# Altium PCB PCB1.PcbDoc
Units mil, origin at the board's own origin, x right, y up, seen from the top; angles counter-clockwise.
Board outline 1540 x 1430 mil, 2 copper layers (Top Layer, Bottom Layer); 5 components, 0 nets, 52 pads, 7 vias.
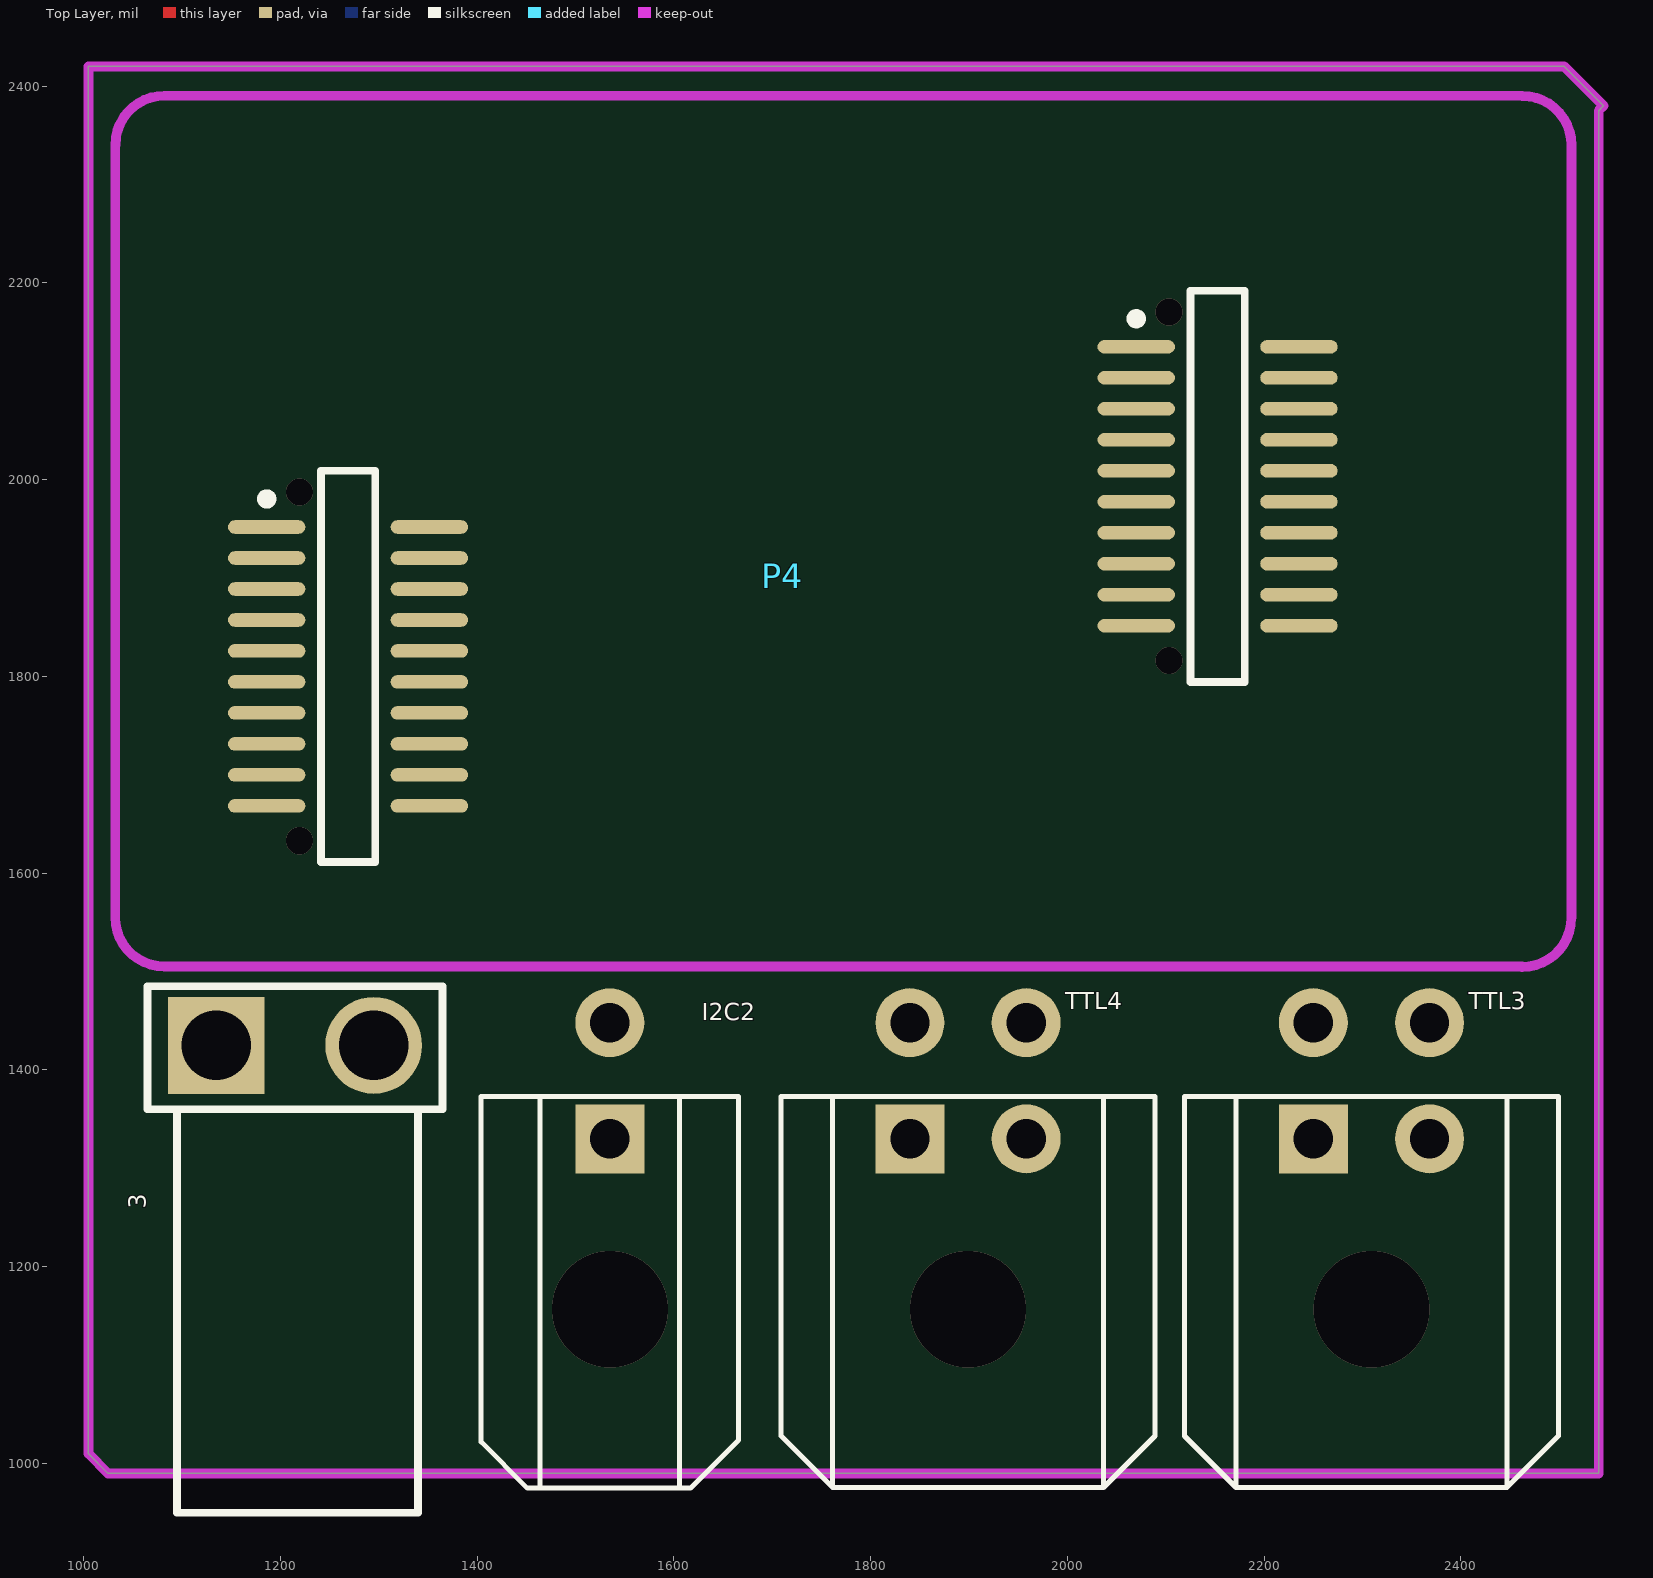
[diagram p0: Top Layer view]
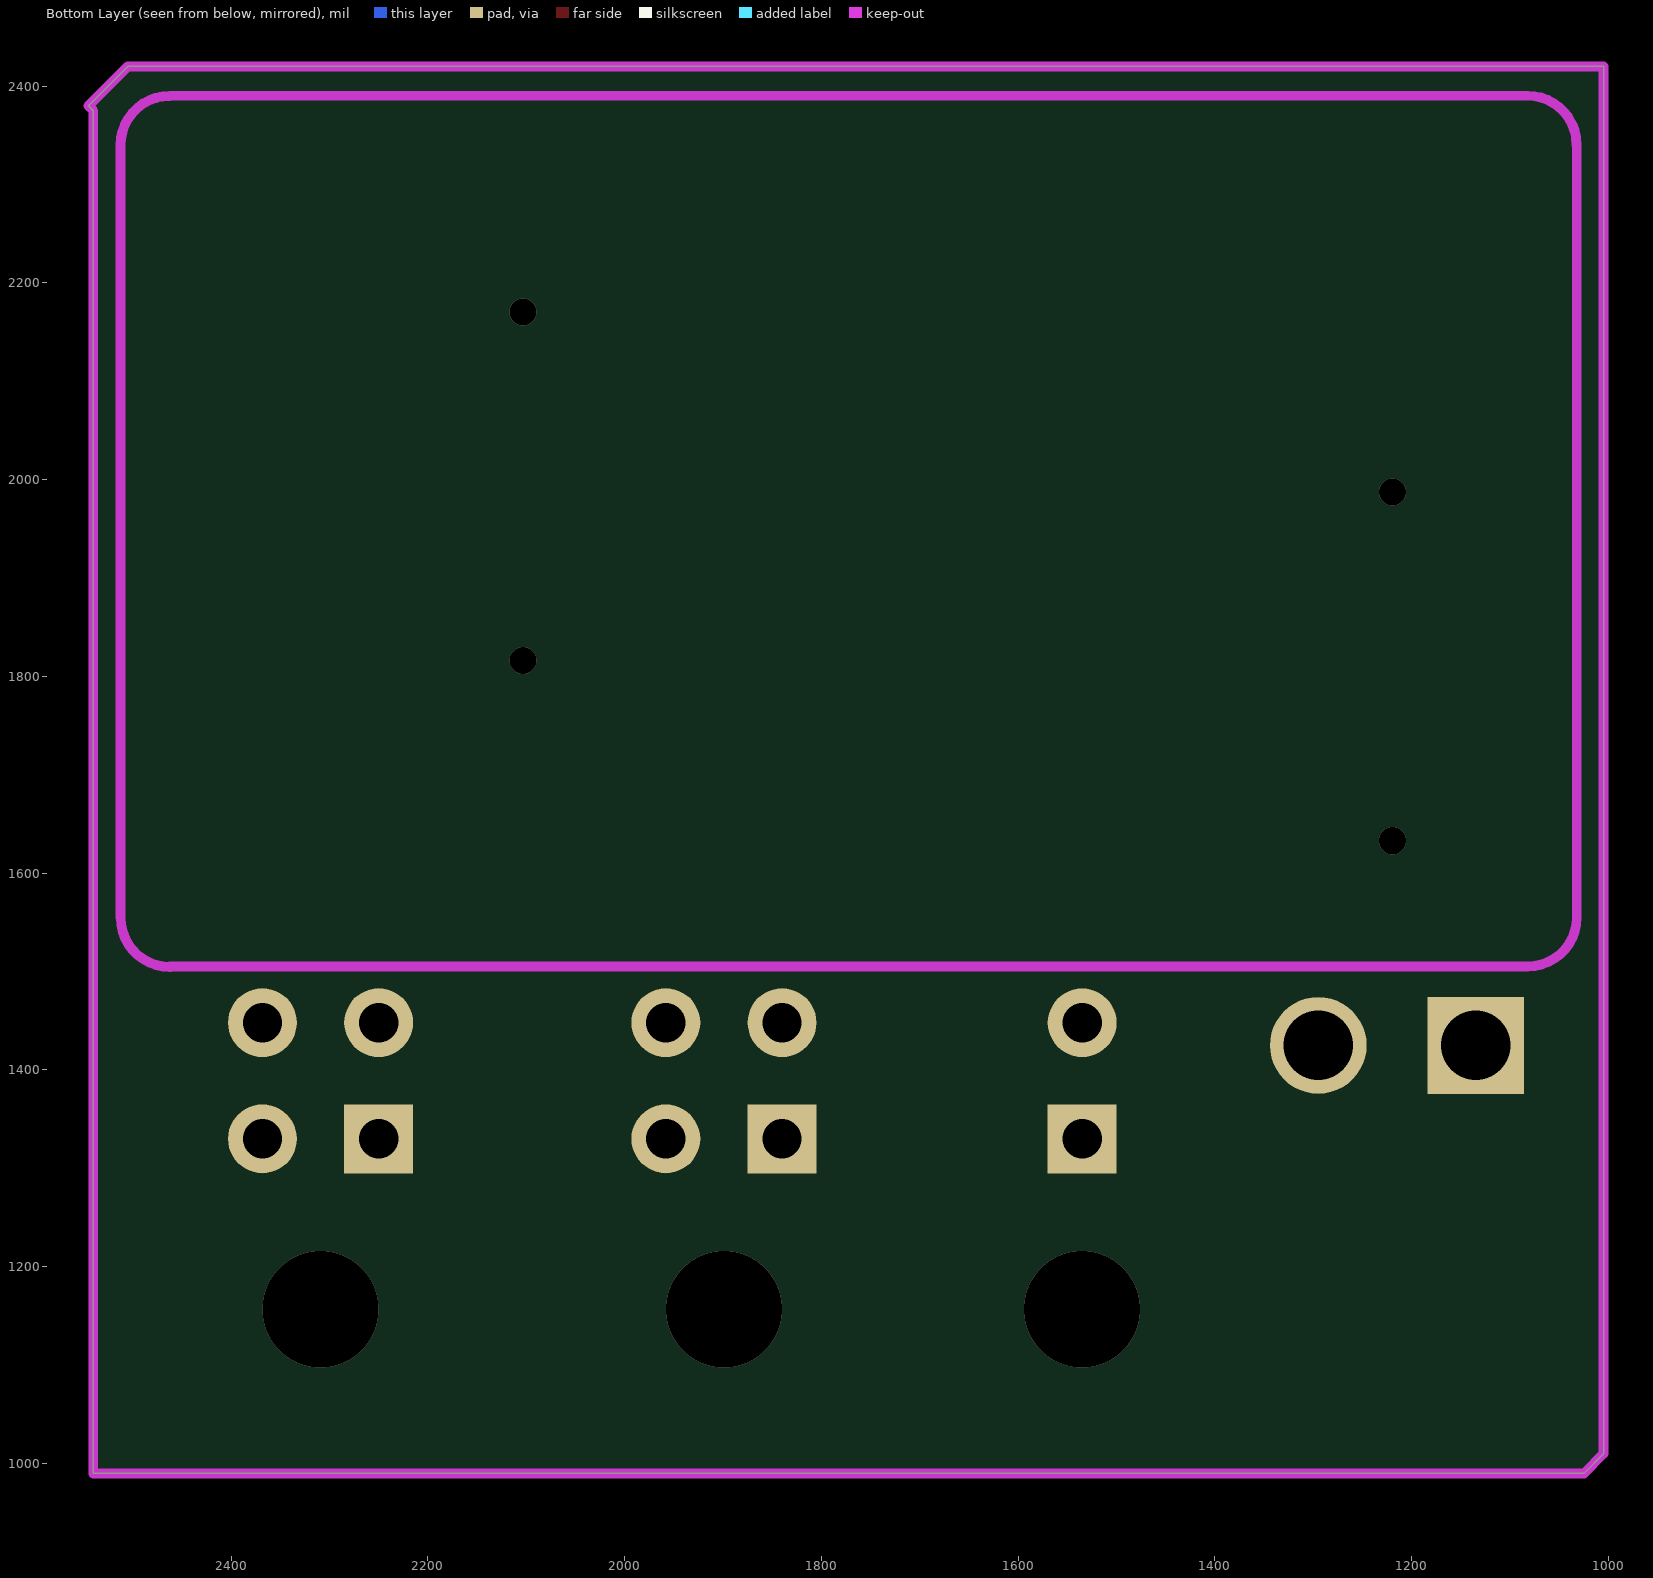
[diagram p1: Bottom Layer view, seen from below]

## Layer stack, top to bottom
Top Solder: solder mask 0.4, Solder Resist, Dk 3.5
Top Layer: signal copper 1.4
Dielectric 1: dielectric 12.6, FR-4, Dk 4.8
Bottom Layer: signal copper 1.4
Bottom Solder: solder mask 0.4, Solder Resist, Dk 3.5

## Board outline
1005,1010 1025,990 2540,990 2540,2375 2545,2380 2505,2420 1005,2420

## Design rules (kind name [scope] priority, off if disabled: settings)
Clearance [All] p1: gap=10 ignorepadtopadclearanceinfootprint=FALSE except(0: Arc-Hole Track-Hole SMDPad-Hole THPad-Hole Via-Hole Fill-Hole Poly-Hole Region-Hole Text-Hole)
PolygonConnect [All] p1: connectstyle=Relief reliefconductorwidth=10 reliefentries=4 polygonreliefangle="90 Angle" airgapwidth=10
RoutingVias [All] p1: holewidth=28 width=50 viastyle="Through Hole" minholewidth=28 minwidth=50 maxholewidth=28 maxwidth=50
SolderMaskExpansion [All] p1: expansion=4 istentingtop=FALSE
Width [All] p1: maxlimit=10 minlimit=10 preferedwidth=10
30 further rules are at their usual default settings.

## Components (designator, comment, footprint, x,y, rotation, side; value= is the part's Value field where it differs from the comment)
3 "CH3.96-2AGW" CH-3.96 1215,1425 r0 top (schematic designator 12V)
I2C2 "MX3.0-2*1P" MX3.0-2*1P 1535,1389.06 r0 top
P4 "Header 20X2" ESP-BORD 163.17,1974.5 r0 top
TTL3 "MX3.0-2*2P" MX3.0-2*2P 2309.05,1389.06 r0 top (schematic designator TTL2)
TTL4 "MX3.0-2*2P" MX3.0-2*2P 1899.05,1389.06 r0 top (schematic designator TTL2)

## Footprints (in the part's own frame and the unit in brackets; to place one, negate y for a bottom-side part, rotate by r counter-clockwise, add the part's x,y. Pads: shape width x height; smd on the part's side, far side on the other; paste and mask are expansions set on the pad)
CH-3.96 [mm]
  rect 2.5x2.5 hole 1.8: 1(-2.032,0)
  round 2.5 hole 1.8: 2(2.032,0)
  silkscreen extent -3.81,-12.06 3.81,1.52
ESP-BORD [mm]
  oval 2x0.35 smd: 1(52.633,4.077) 2(52.633,3.277) 3(52.633,2.477) 4(52.633,1.677) 5(52.633,0.877) 6(52.633,0.077) 7(52.633,-0.723) 8(52.633,-1.523) 9(52.633,-2.323) 10(52.633,-3.123) 11(48.433,-3.123) 12(48.433,-2.323) 13(48.433,-1.523) 14(48.433,-0.723) 15(48.433,0.077) 16(48.433,0.877) 17(48.433,1.677) 18(48.433,2.477) 19(48.433,3.277) 20(48.433,4.077) 21(25.985,-7.775) 22(25.985,-6.975) 23(25.985,-6.175) 24(25.985,-5.375) 25(25.985,-4.575) 26(25.985,-3.775) 27(25.985,-2.975) 28(25.985,-2.175) 29(25.985,-1.375) 30(25.985,-0.575) 31(30.185,-0.575) 32(30.185,-1.375) 33(30.185,-2.175) 34(30.185,-2.975) 35(30.185,-3.775) 36(30.185,-4.575) 37(30.185,-5.375) 38(30.185,-6.175) 39(30.185,-6.975) 40(30.185,-7.775)
  Keep-Out Layer lines w0.254: 22.074,-10.652 ccw(c23.344,-10.652) 23.344,-11.922 58.395,-11.922 ; 22.077,-10.652 22.077,9.29 ; 22.079,9.29 cw(c23.349,9.29) 23.349,10.56 ; 23.349,10.557 58.399,10.557 ; 58.395,-11.934 ccw(c58.395,-10.664) 59.665,-10.664 ; 58.399,10.556 cw(c58.399,9.286) 59.669,9.286 ; 59.669,-10.664 59.669,9.271
  silkscreen extent 25.86,-9.23 51.23,5.53, body extent 25.58,-9.14 52.99,5.41, height 6
MX3.0-2*1P [mil]
  rect 70x70 hole 40: 1(0,-59.06)
  round 70 hole 40: 2(0,59)
  silkscreen extent -131,-414 131,-16
MX3.0-2*2P [mil]
  rect 70x70 hole 40: 1(-59.05,-59.06)
  round 70 hole 40: 2(-59.05,59.05) 3(59.06,59.05) 4(59.06,-59.06)
  silkscreen extent -190,-413 190,-16

## Part data
P4: "Header, 20-Pin, Dual row", LatestRevisionDate=17-Jul-2002, LatestRevisionNote="Re-released for DXP Platform.", Publisher="Altium Limited"

## Via types
v1: diameter 27.56, hole 27.56, Top Layer to Bottom Layer, 4 vias
v2: diameter 118.11, hole 118.11, Top Layer to Bottom Layer, 3 vias

## Nets (pads, with @x,y where several pads share a name; then routed paths per layer and width w, separated by ;. In a path a pad name is that pad's centre, name@x,y a point inside that pad or via, vN(x,y) a via of type N, cw(c..) or ccw(c..) an arc to the next point about the centre after c; other vN are vias at no path point)
pads on no net: 3.1 3.2 I2C2.1 I2C2.2 P4.1 P4.2 P4.3 P4.4 P4.5 P4.6 P4.7 P4.8 P4.9 P4.10 P4.11 P4.12 P4.13 P4.14 P4.15 P4.16 P4.17 P4.18 P4.19 P4.20 P4.21 P4.22 P4.23 P4.24 P4.25 P4.26 P4.27 P4.28 P4.29 P4.30 P4.31 P4.32 P4.33 P4.34 P4.35 P4.36 P4.37 P4.38 P4.39 P4.40 TTL3.1 TTL3.2 TTL3.3 TTL3.4 TTL4.1 TTL4.2 TTL4.3 TTL4.4
copper on no net:
  other v1: 1219.67,1632.95 2103.46,1816.1 1219.67,1987.28 2103.46,2170.43
  other v2: 1535,1156.77 1899.05,1156.77 2309.05,1156.77

## Keep-outs
Keep-Out Layer:
  the board outline again, w10